# Altium PCB PCB.PcbDoc
Units mm, origin at the board's own origin, x right, y up, seen from the top; angles counter-clockwise.
Board outline 73 x 30 mm, 2 copper layers (Top Layer, Bottom Layer); 26 components, 15 nets, 68 pads, 6 vias.
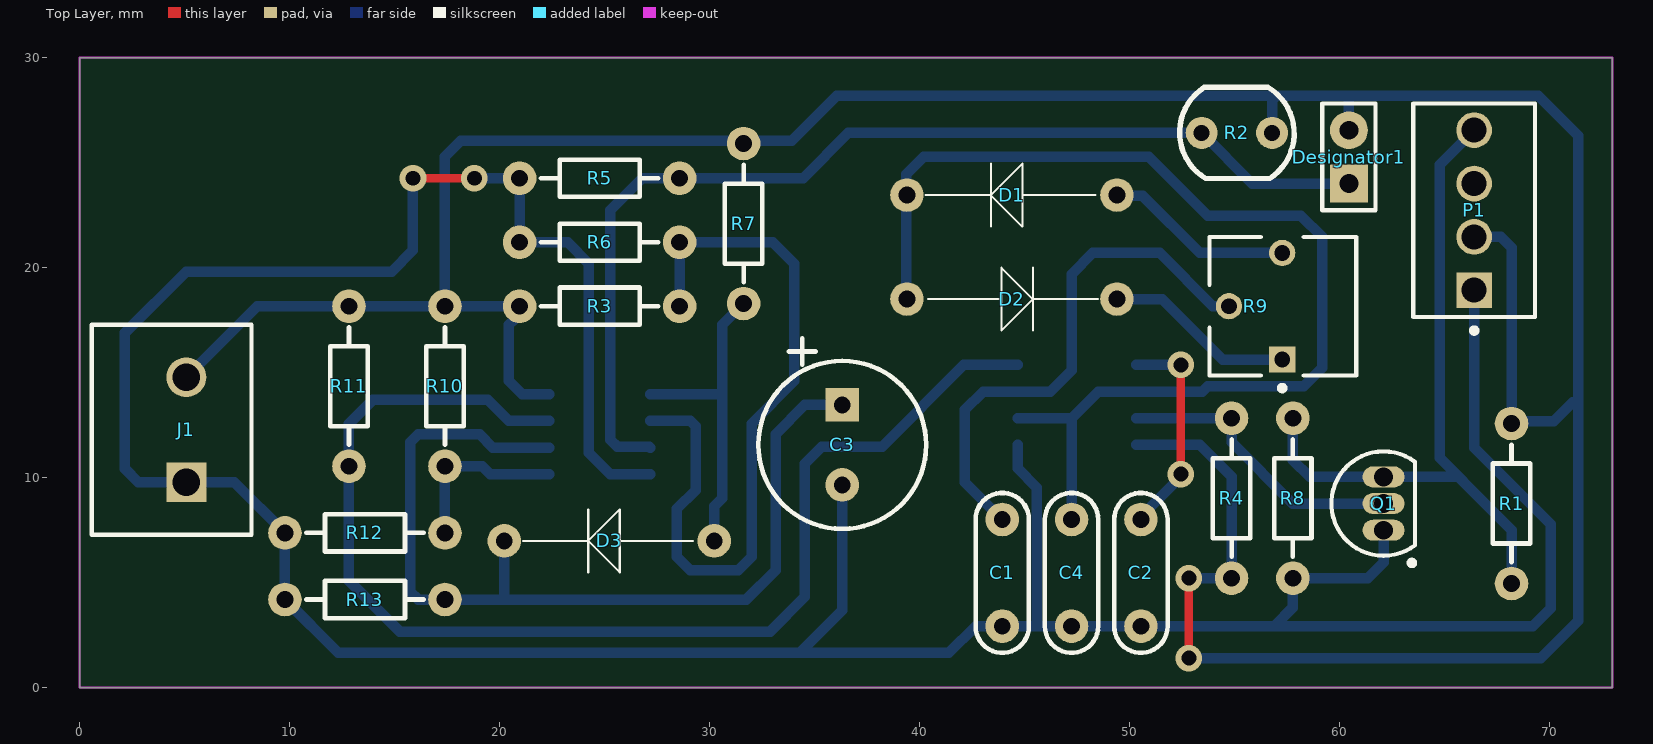
[diagram p0: Top Layer view]
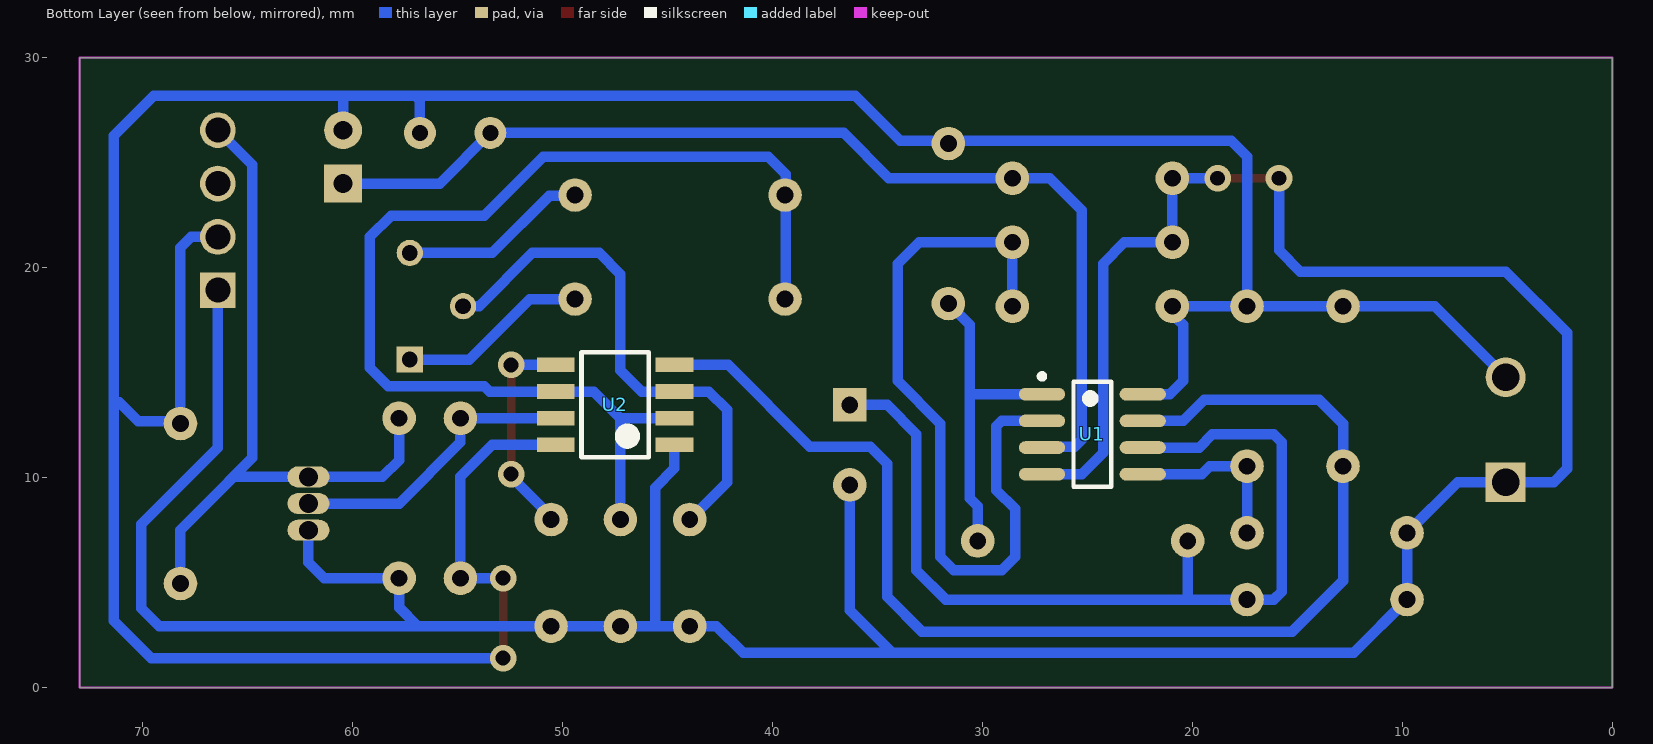
[diagram p1: Bottom Layer view, seen from below]
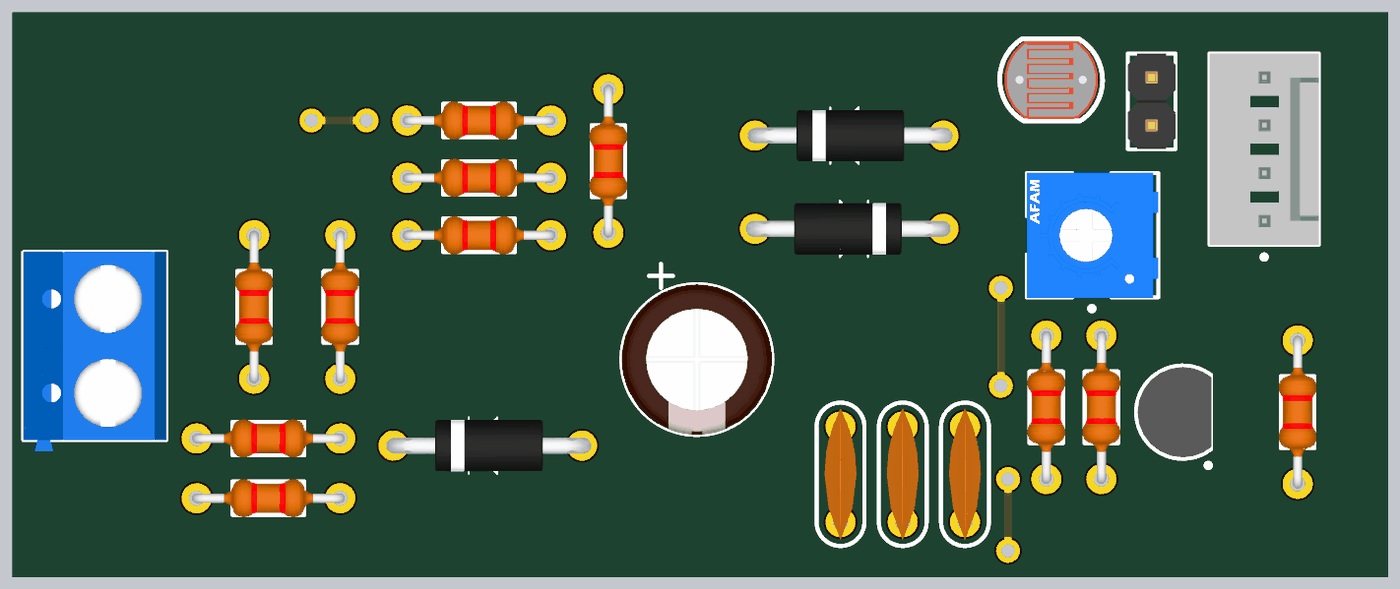
[diagram p2: 3D render of the assembled board from above, using the file's embedded part models]

## Layer stack, top to bottom
Top Solder: solder mask 0.0102, Solder Resist, Dk 3.5
Top Layer: signal copper 0.0356
Dielectric 1: dielectric 0.32, FR-4, Dk 4.8
Bottom Layer: signal copper 0.0356
Bottom Solder: solder mask 0.0102, Solder Resist, Dk 3.5

## Board outline
0,0 73,0 73,30 0,30

## Design rules (kind name [scope] priority, off if disabled: settings)
Clearance [All] p1: gap=0.254 ignorepadtopadclearanceinfootprint=FALSE except(0: Arc-Hole Track-Hole SMDPad-Hole THPad-Hole Via-Hole Fill-Hole Poly-Hole Region-Hole Text-Hole)
PolygonConnect [All] p1: connectstyle=Relief reliefconductorwidth=0.254 reliefentries=4 polygonreliefangle="90 Angle" airgapwidth=0.254
RoutingVias [All] p1: holewidth=0.711 width=1.27 viastyle="Through Hole" minholewidth=0.711 minwidth=1.27 maxholewidth=0.711 maxwidth=1.27
SolderMaskExpansion [All] p1: expansion=0.102
Width [All] p1: maxlimit=0.5 minlimit=0.3 preferedwidth=0.4 minimp=50.000000 maximp=50.000000 favimp=50.000000
30 further rules are at their usual default settings.

## Classes and differential pairs
component class Schematic: C1 C2 C3 C4 D1 D2 D3 J1 P1 Q1 R1 R2 R3 R4 R5 R6 R7 R8 R10 R11 R12 R13 U1 U2

## Components (designator, comment, footprint, x,y, rotation, side; value= is the part's Value field where it differs from the comment)
C1 "CAP_CERAM" CAP_CERAM 43.942,5.461 r90 top
C2 "CAP_CERAM" CAP_CERAM 50.546,5.461 r90 top
C3 "CAP_ELEC_8*11" CAP_ELEC_8*11 36.322,11.557 r270 top
C4 "CAP_CERAM" CAP_CERAM 47.244,5.461 r90 top
D1 "1N4148" DO-41 49.403,23.454 r180 top
D2 "1N4148" DO-41 39.403,18.501 r0 top
D3 "1N4148" DO-41 30.226,6.985 r180 top
Designator1 "Comment" PLS-02 60.452,24.003 r90 top
J1 "KF120-02P-14" DG301-5.0-02P-1X 5.08,9.779 r90 top
P1 "22-27-2041" MOLX-22-27-2041_V 66.421,22.733 r270 top
Q1 "2N7000" TO-92A 62.103,8.763 r0 top
R1 "RES-0.125" RES-0.125 68.199,8.763 r90 top
R2 "Photoresistor" Photoresistor 55.118,26.416 r0 top
R3 "RES-0.125" RES-0.125 24.765,18.161 r180 top
R4 "RES-0.125" RES-0.125 54.864,9.017 r90 top
R5 "RES-0.125" RES-0.125 24.765,24.257 r0 top
R6 "RES-0.125" RES-0.125 24.765,21.209 r0 top
R7 "RES-0.125" RES-0.125 31.623,22.098 r90 top
R8 "RES-0.125" RES-0.125 57.785,9.017 r90 top
R9 "3296W" BOUR-3362P 57.312,18.161 r90 top value=100k
R10 "RES-0.125" RES-0.125 17.399,14.351 r90 top
R11 "RES-0.125" RES-0.125 12.827,14.351 r270 top
R12 "RES-0.125" RES-0.125 13.589,7.366 r0 top
R13 "RES-0.125" RES-0.125 13.589,4.191 r0 top
U1 "LM393" SO-8_N 24.765,12.065 r180 bottom
U2 "NE555" SOIC8 47.498,13.462 r0 bottom

## Footprints (in the part's own frame and the unit in brackets; to place one, negate y for a bottom-side part, rotate by r counter-clockwise, add the part's x,y. Pads: shape width x height; smd on the part's side, far side on the other; paste and mask are expansions set on the pad)
BOUR-3362P [mm] "THD, 3-Leads, Body 6.6x6.99mm, Pitch 2.54mm"
  rect 1.25x1.25 hole 0.75: 1(-2.54,0.035)
  round 1.25 hole 0.75: 2(0,2.575) 3(2.54,0.035)
  silkscreen extent -4.02,-3.49 3.3,3.5, body extent -3.33,-3.49 3.32,3.49, height 4.75
CAP_CERAM [mm]
  round 1.6 hole 0.8: 1(-2.54,0) 2(2.54,0)
  silkscreen extent -3.81,-1.27 3.81,1.27, body extent -3.5,-0.85 3.5,0.85, height 7.5
CAP_ELEC_8*11 [mm]
  round 1.6 hole 0.8: 1(1.905,0)
  rect 1.6x1.6 hole 0.8: 2(-1.905,0)
  silkscreen extent -5.08,-4 4,4, body extent -4,-4 4,4, height 11
DG301-5.0-02P-1X [mm]
  rect 1.9x1.9 hole 1.3 mask+0.102: 1(0,0)
  round 1.9 hole 1.3 mask+0.102: 2(5,0)
  silkscreen extent -2.5,-3.1 7.5,4.5, body extent -3.1,-3.1 7.5,4.5, height 10
DO-41 [mm]
  round 1.6 hole 0.8: 1(10,0) 2(0,0)
  silkscreen extent 1.02,-1.5 9.1,1.5, body extent -0.5,-1.36 10.36,1.36, height 4.36
MOLX-22-27-2041_V [mm] "CONN, 4-Leads, Body 10.16x5.8mm, Pitch 2.54mm"
  rect 1.7x1.7 hole 1.19: 1(3.81,0)
  round 1.7 hole 1.19: 2(1.27,0) 3(-1.27,0) 4(-3.81,0)
  silkscreen extent -5.08,-2.9 5.85,2.9, body extent -5.08,-2.9 5.08,2.9, height 11.7
Photoresistor [mil]
  round 60 hole 30: 1(-66,0) 2(66,0)
  silkscreen extent -107,-86 107,86, body extent -98,-81 98,82, height 89
PLS-02 [mm]
  rect 1.8x1.8 hole 0.9: 1(0,0)
  round 1.8 hole 0.9: 2(2.54,0)
  silkscreen extent -1.27,-1.27 3.81,1.27, body extent -1.27,-1.27 3.81,1.27, height 8.6
RES-0.125 [mm]
  round 1.6 hole 0.8: 1(-3.81,0) 2(3.81,0)
  silkscreen extent -2.79,-0.89 2.79,0.89, body extent -4.05,-1 4.05,1, height 2.3
SO-8_N [mm] "SOIC, 8-Leads, Body 4.9x3.9mm, Pitch 1.27mm, IPC Medium Density"
  oval 2.2x0.6 smd: 1(-2.4,1.905) 2(-2.4,0.635) 3(-2.4,-0.635) 4(-2.4,-1.905) 5(2.4,-1.905) 6(2.4,-0.635) 7(2.4,0.635) 8(2.4,1.905)
  silkscreen extent -2.53,-2.5 0.9,2.88, body extent -3.02,-2.45 3.02,2.45, height 1.65
SOIC8 [mm] "SOIC, 8-Leads, Body 4,90x3,90mm, Pitch 1,27mm, IPC Medium Density"
  rect 1.8x0.7 smd: 1(-2.825,1.905) 2(-2.825,0.635) 3(-2.825,-0.635) 4(-2.825,-1.905) 5(2.825,-1.905) 6(2.825,-0.635) 7(2.825,0.635) 8(2.825,1.905)
  silkscreen extent -1.6,-2.5 1.6,2.5, body extent -3,-2.5 3,2.5, height 1.75
TO-92A [mm] "TO, Flat Index; 3 In-Line, Axial Leads; Body Dia. 4.5mm; Leads 0.51 x 0.48 mm (max)"
  oval 2x1 hole 0.9: 1(0,-1.27) 2(0,0) 3(0,1.27)
  silkscreen extent -2.48,-2.95 1.5,2.48, body extent -2.4,-2.4 1.53,2.4, height 9

## Part data
C1 C2 C4: "Ceramic capacitor"
  C1 C2: Val=100nF
  C4: Val=500pF
C3: "Electrolitic capacitor", Val=100uF
D1 D2 D3: library part 1N4007, "1 A Rectifier Diode, 1000 V, -65 to 175 degC, 2-Pin DO-214AC", Manufacturer=Kesenes, Operating Temperature Range="-65 to 175 degC", CD="15 pF", ComponentLink1Description="Manufacturer URL", ComponentLink1URL=http://www.kesenes.com/, ComponentLink2Description=Datasheet, ComponentLink2URL=http://www.kesenes.com/PDF/1n4001-1n4007.pdf, ComponentLink3Description="Package Specification", ComponentLink3URL=http://www.kesenes.com/PDF/1n4001-1n4007.pdf, DatasheetVersion=Mar-06, IFSM="30 A", IR DC="0.05 mA", Mounting Technology="Surface Mount", PackageDescription="2-Pin SMD, Body 4.2925 x 2.6925 mm, Height 2.438 mm", PackageReference=DO-214AC-2, PackageVersion=Mar-06, PartNumber=1N4007, VF="1.1 V", VPK="1000 V"
J1: library part Terminal_2, "Euro Terminal Block, 6 A, 150 V, -40 to 105 degC, Pitch 2.54 mm, 1x2 Position, Height 8.6 mm, Tail Length 3.3 mm", Color=Green, Contact Resistance="20 mOhm", Insulation Resistance="5000 MOhm / 1000 V", Manufacturer="Cixi KaiFeng", Rated Current="6 A", Rated Voltage="150 V", Temp. Range="-40 to 105 degC", Withstanding Voltage="AC 1500 V / 1 Min", ComponentLink1Description="Manufacturer URL", ComponentLink1URL=http://www.nb-kaifeng.com/, ComponentLink2Description=Datasheet, ComponentLink2URL=http://www.nb-kaifeng.com/upload/editor/ext_pdf/201305290533202245.pdf, Contact=Brass, Mounting Technology="Through Hole", No. of Pole=2, PackageDescription="Terminal Block, Pitch 2.54 mm, 1 x 2 Position, Height 8.6 mm, Tail Length 3.3 mm", PackageReference=KF120-2, PartNumber=KF120-02P-14, Pitch="Single Pitch"
P1: library part "Molex 1x4 2.54 FAN", "Male Header, Pitch 2.54 mm, 1 x 4 Position, Height 11.7 mm, Tail Length 3.56 mm, RoHS, Bulk", Current rating=4A, Manufacturer=Molex, Operating temperature=0degCto+75degC, Voltage rating=250V, Contact material=Tinplatedbrass, Datasheet URL=http://www.molex.com/pdm_docs/sd/022272041_sd.pdf, Datasheet Version="Rev. F, 06/2009", Housing material=Nylon(UL94V-0), Manufacturer URL=http://www.molex.com/
Q1: "Small Signal MOSFET / 200 mAmps, 60 Volts", Drain-Source On Resistance-Max=0.045O, Drain-to-Source Voltage [Vdss]=20V, Manufacturer="International Rectifier", Package Description="3-Pin Small Outline Transistor, Body 2.92 x 1.3 mm, Pitch 0.95 mm", Package Reference=SOT-23-3, Rated Power Dissipation=1.25W, Channel Type=N-Channel, Datasheet URL=https://datasheet.ciiva.com/6383/irlml2502pbf-6383216.pdf, Datasheet Version=Apr-14, Manufacturer URL=http://internationalrectifier.com/, Qg Gate Charge=8nC
R2: "PR"
R9: library part Potentiometer, "3296 - 3/8 ” Square Trimpot(R) Trimming Potentiometer,, +/- 10%, 0.5 W, -55 to 125 degC, 3-Pin THD, RoHS, Tube"
U1: "Low Power Low Offset Voltage Dual Comparator, 8-pin Narrow SOIC, Pb-Free", Manufacturer="Texas Instruments", Package Reference=D0008A, PackageTopMarking=NSZXTT*LM*393M, PowerWise=N, Code_IPC=SOIC127P600-8, Code_JEDEC=MS-012-AA, ComponentLink1Description="Datasheet URL", ComponentLink1URL=http://www.ti.com/general/docs/lit/getliterature.tsp?genericPartNumber=LM393-N&fileType=pdf, CompType=Amplifiers, PackageDescription="SOIC Narrow, 4.9 x 3.9 x 1.45mm, 8 Lead, 1.27mm Pitch", PinCount=8, RoHS=Y
U2: "NE555, DIP-8"
R1: Val=1.5k
R3 R4 R6 R10 R11: Val=10k
R7: Val=220
R8 R12: Val=1k
R13: Val=500k

## Via types
v1: diameter 1.27, hole 0.711, Top Layer to Bottom Layer, 6 vias

## Nets (pads, with @x,y where several pads share a name; then routed paths per layer and width w, separated by ;. In a path a pad name is that pad's centre, name@x,y a point inside that pad or via, vN(x,y) a via of type N, cw(c..) or ccw(c..) an arc to the next point about the centre after c; other vN are vias at no path point)
+12: Designator1.2 J1.2 P1.2 R1.2 R2.2 R3.2 R4.1 R7.2 R10.2 R11.1 U1.8 U2.8 | length 161.8
  Top Layer w0.4: v1(52.832,1.397) v1(52.832,5.207)
  Bottom Layer w0.5: J1.2 8.462,18.161 R11.1 R10.2 ; U1.8 21.082,13.97 20.447,14.605 20.447,17.272 20.701,17.526 20.701,17.907 R3.2 R10.2 ; U2.8 53.34,11.557 54.864,10.033 R4.1 v1(52.832,5.207) ; v1(52.832,1.397) 69.596,1.397 71.374,3.175 71.374,26.289 69.469,28.194 60.452,28.194 ; R2.2 56.794,27.965 57.023,28.194 ; Designator1.2 60.452,28.194 ; P1.2 67.691,21.463 68.199,20.955 R1.2 68.309,12.683 70.214,12.683 71.12,13.589 ; R10.2 17.399,25.273 18.161,26.035 33.909,26.035 36.068,28.194 57.023,28.194 ; 57.023,28.194 60.452,28.194
GND: C1.1 C2.1 C3.1 C4.1 J1.1 P1.1 Q1.1 R5.1 R6.1 R8.1 R12.1 R13.1 U1.4 U2.1 | length 166.9
  Top Layer w0.4: v1(15.875,24.257) v1(18.796,24.257)
  Bottom Layer w0.5: v1(15.875,24.257) 15.875,20.828 14.859,19.812 5.08,19.812 2.159,16.891 2.159,10.414 2.794,9.779 J1.1 7.366,9.779 R12.1 R13.1 12.319,1.651 41.402,1.651 42.672,2.921 C1.1 45.593,2.921 ; v1(18.796,24.257) R5.1 R6.1 23.241,21.209 24.257,20.193 24.257,11.176 25.273,10.16 U1.4 ; 34.417,1.778 36.322,3.683 C3.1 ; U2.1 44.673,10.445 45.593,9.525 45.593,2.921 ; Q1.1 62.103,5.969 61.341,5.207 R8.1 57.785,3.81 56.896,2.921 ; P1.1 66.421,11.43 70.065,7.786 70.065,3.771 69.215,2.921 56.896,2.921 ; 45.593,2.921 C4.1 C2.1 56.896,2.921
NetC1_2: C1.2 R9.2 U2.3 | length 25.4
  Bottom Layer w0.5: C1.2 42.164,9.779 42.164,13.228 43.033,14.097 U2.3 46.228,14.097 47.244,15.113 47.244,19.685 48.26,20.701 51.435,20.701 53.975,18.161 R9.2
NetC2_2: C2.2 U2.5 | length 10.3
  Top Layer w0.4: v1(52.451,10.16) v1(52.451,15.367)
  Bottom Layer w0.5: U2.5 v1(52.451,15.367) ; C2.2 50.546,8.128 52.451,10.033 v1(52.451,10.16)
NetC3_2: C3.2 D3.1 R13.2 U1.6 | length 44.3
  Bottom Layer w0.5: 20.226,4.318 D3.1 ; U1.6 19.685,11.43 19.05,12.065 16.129,12.065 15.748,11.684 15.748,4.572 16.129,4.191 R13.2 31.75,4.191 33.147,5.588 33.147,12.065 34.544,13.462 35.484,13.462
NetC4_2: C4.2 D1.1 D2.2 U2.2 U2.6 | length 54.2
  Bottom Layer w0.5: D2.2@39.37,18.501 39.37,24.437 40.206,25.273 50.927,25.273 53.721,22.479 58.166,22.479 59.182,21.463 59.182,15.24 58.293,14.351 53.721,14.351 53.467,14.097 U2.6 48.514,14.097 47.244,12.827 ; U2.2 47.244,12.827 ; C4.2 47.244,12.827
NetD1_2: D1.2 R9.3 | length 9.1
  Bottom Layer w0.5: D1.2@49.36,23.411 50.63,23.411 53.34,20.701 R9.3 ; R9.3@57.419,20.554 R9.3@57.439,20.574
NetD2_1: D2.1 R9.1 | length 9.1
  Bottom Layer w0.5: D2.1 51.562,18.501 54.442,15.621 R9.1 ; R9.1@57.396,15.537 R9.1@57.439,15.494
NetD3_2: D3.2 R7.1 U1.1 | length 15.2
  Bottom Layer w0.5: U1.1 30.607,13.97 ; D3.2 30.226,8.636 30.607,9.017 30.607,13.97 ; R7.1@31.686,17.843 31.178,17.843 30.607,17.272 30.607,13.97
NetP1_4: P1.4 Q1.3 R1.1 R8.2 | length 34.2
  Bottom Layer w0.5: R8.2 57.785,10.826 58.578,10.033 Q1.3 65.659,10.033 68.199,7.493 R1.1 ; 65.865,9.858 64.77,10.953 64.77,24.892 P1.4
NetQ1_2: Q1.2 R4.2 U2.7 | length 14.1
  Bottom Layer w0.5: U2.7 R4.2 54.864,11.684 57.785,8.763 Q1.2
NetR2_1: Designator1.1 R2.1 R5.2 U1.3 | length 51.1
  Bottom Layer w0.5: U1.3 27.127,11.468 25.616,11.468 25.273,11.811 25.273,22.733 26.797,24.257 R5.2 34.455,24.257 36.614,26.416 R2.1 55.855,24.003 Designator1.1@60.833,24.003
NetR3_1: R3.1 R6.2 U1.2 | length 36.7
  Bottom Layer w0.5: U1.2 29.083,12.7 29.337,12.446 29.337,9.398 28.448,8.509 28.448,6.223 29.083,5.588 31.369,5.588 32.004,6.223 32.004,12.573 34.036,14.605 34.036,20.193 33.02,21.209 R6.2 R3.1
NetR10_1: R10.1 R12.2 U1.5 | length 8.3
  Bottom Layer w0.5: R12.2 R10.1 19.177,10.541 19.558,10.16 U1.5
NetR11_2: R11.2 U1.7 U2.4 | length 59.8
  Bottom Layer w0.5: U1.7 20.447,12.7 19.431,13.716 13.97,13.716 12.827,12.573 R11.2 12.827,5.08 15.24,2.667 32.893,2.667 34.544,4.318 34.544,10.668 35.344,11.468 38.218,11.468 42.117,15.367 U2.4
pads on no net: P1.3

## Keep-outs
Keep-Out Layer:
  the board outline again, w0.1